# Altium PCB Test_Jig_Project.PcbDoc
Units mil, origin at the board's own origin, x right, y up, seen from the top; angles counter-clockwise.
Board outline 4425 x 3925 mil, 2 copper layers (Top Layer, Bottom Layer); 33 components, 51 nets, 183 pads, 42 vias.
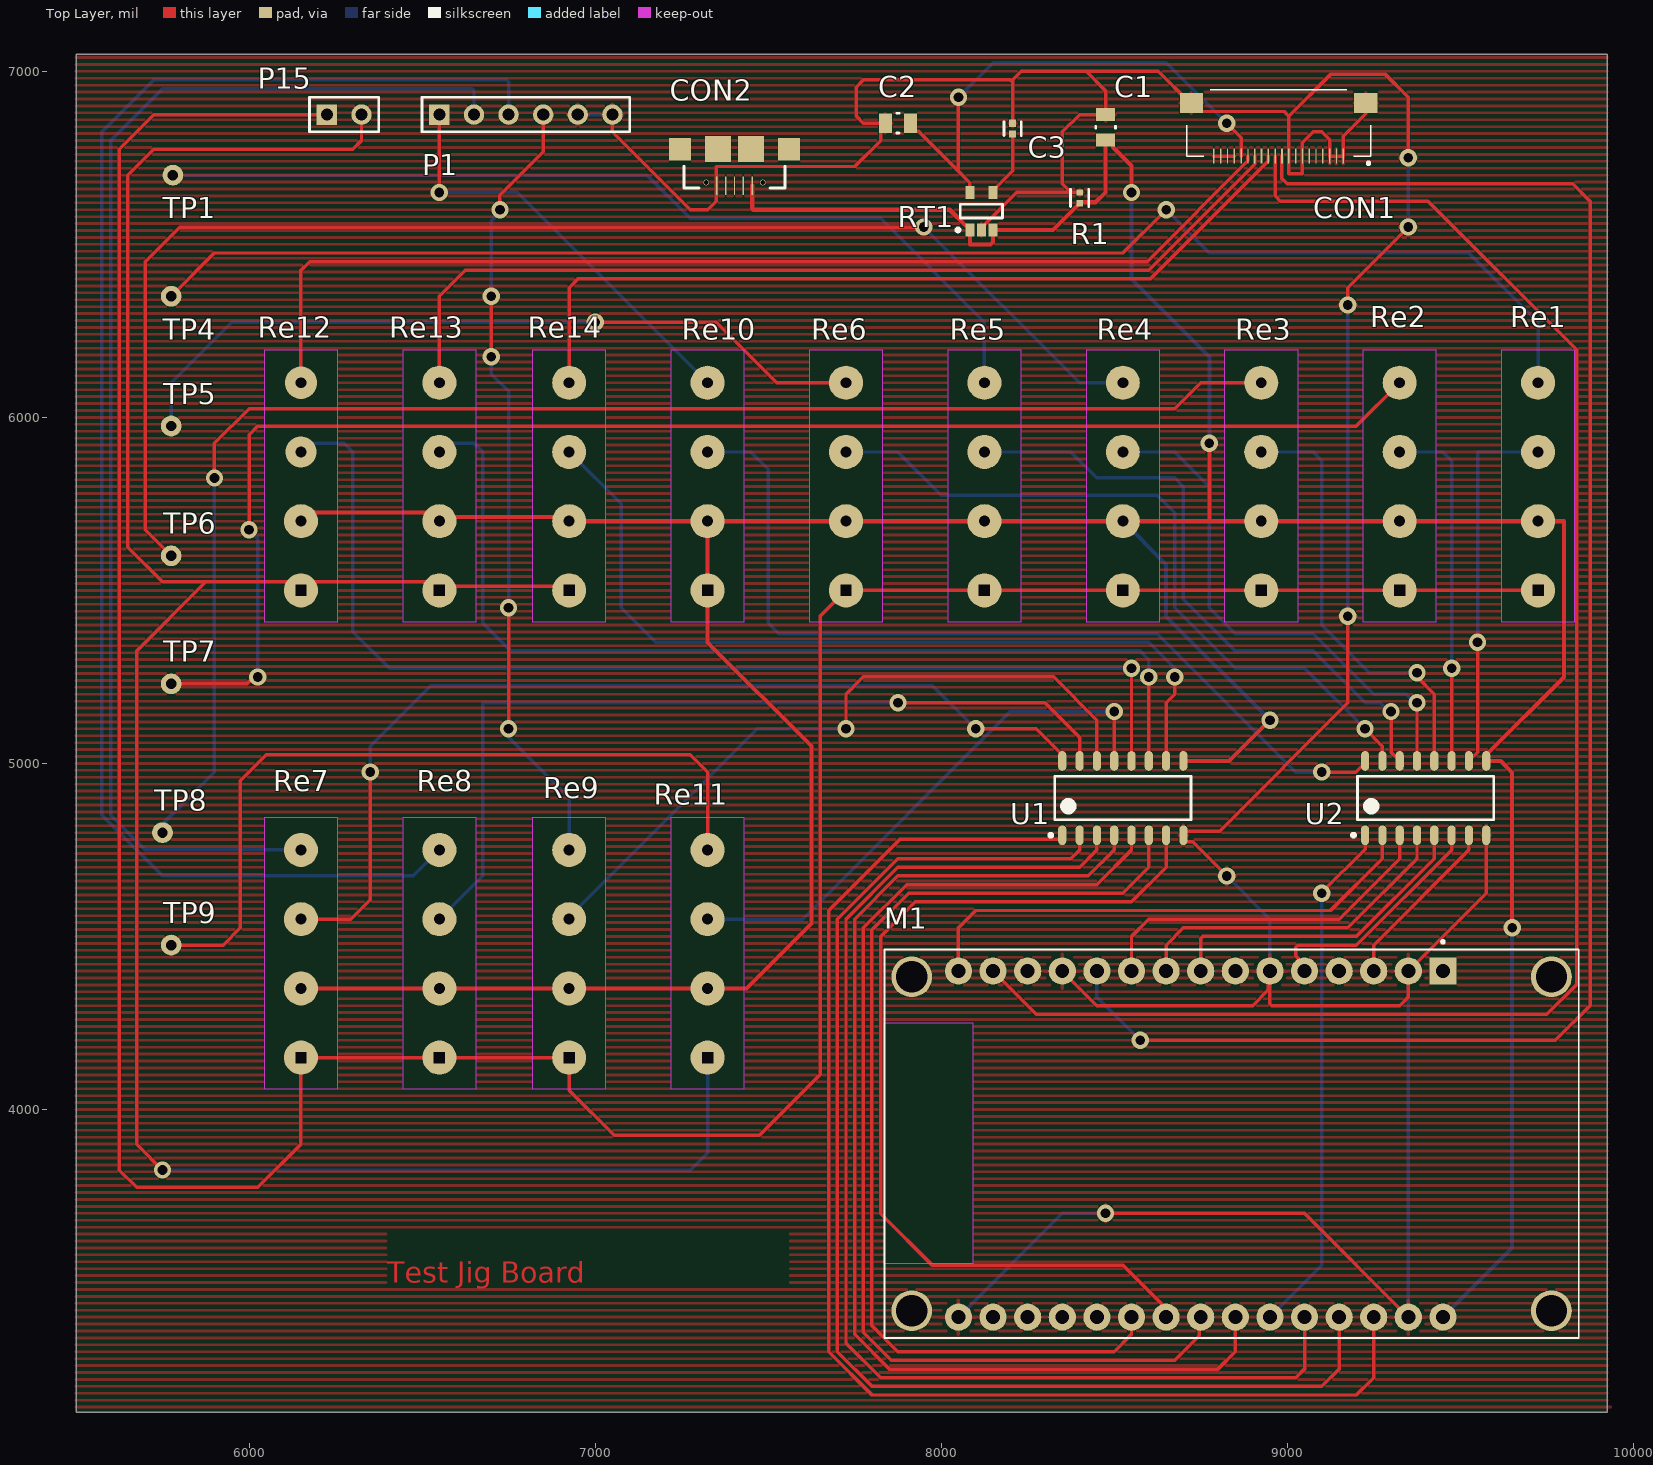
[diagram p0: Top Layer view]
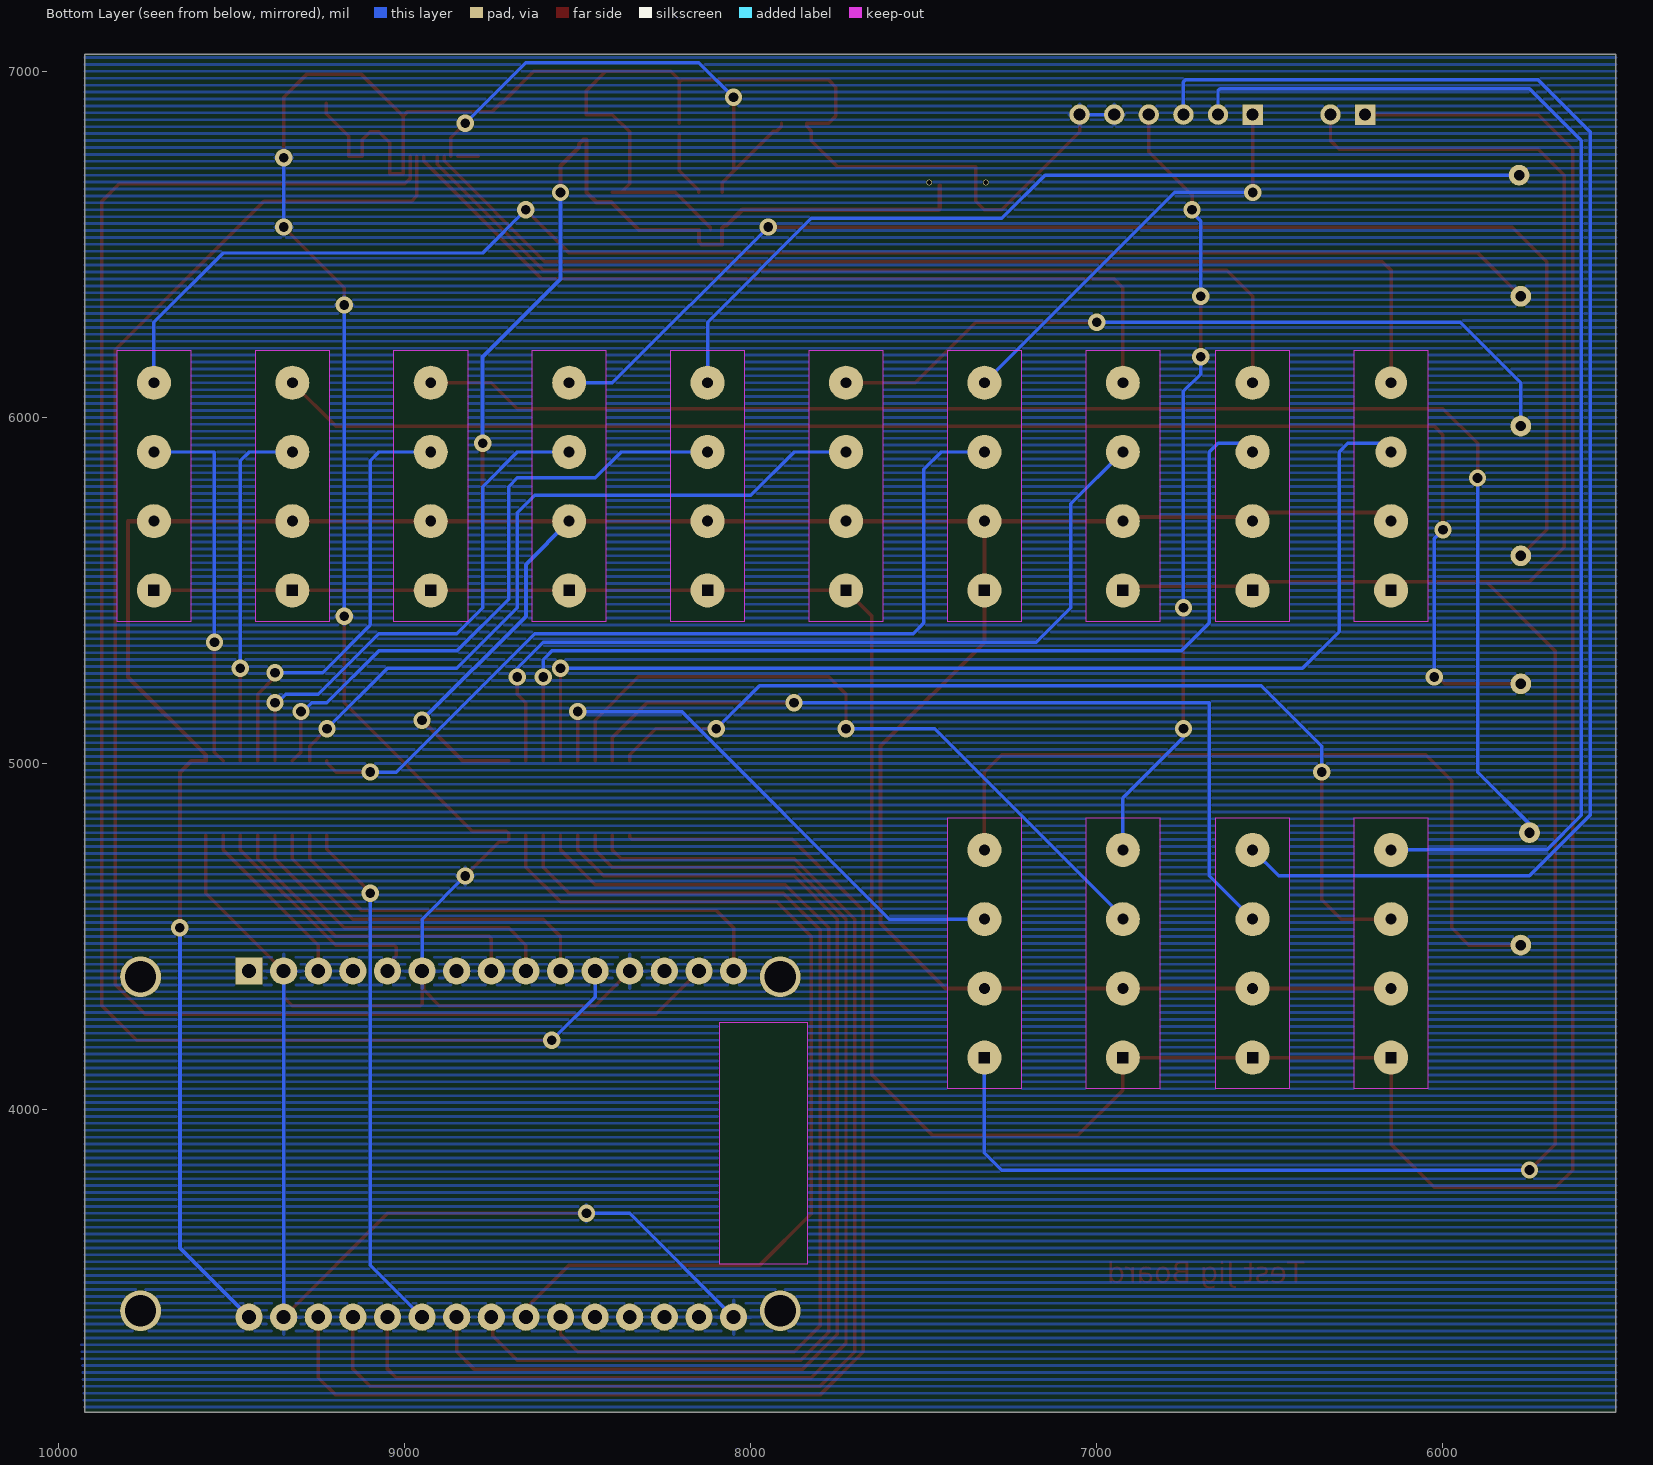
[diagram p1: Bottom Layer view, seen from below]
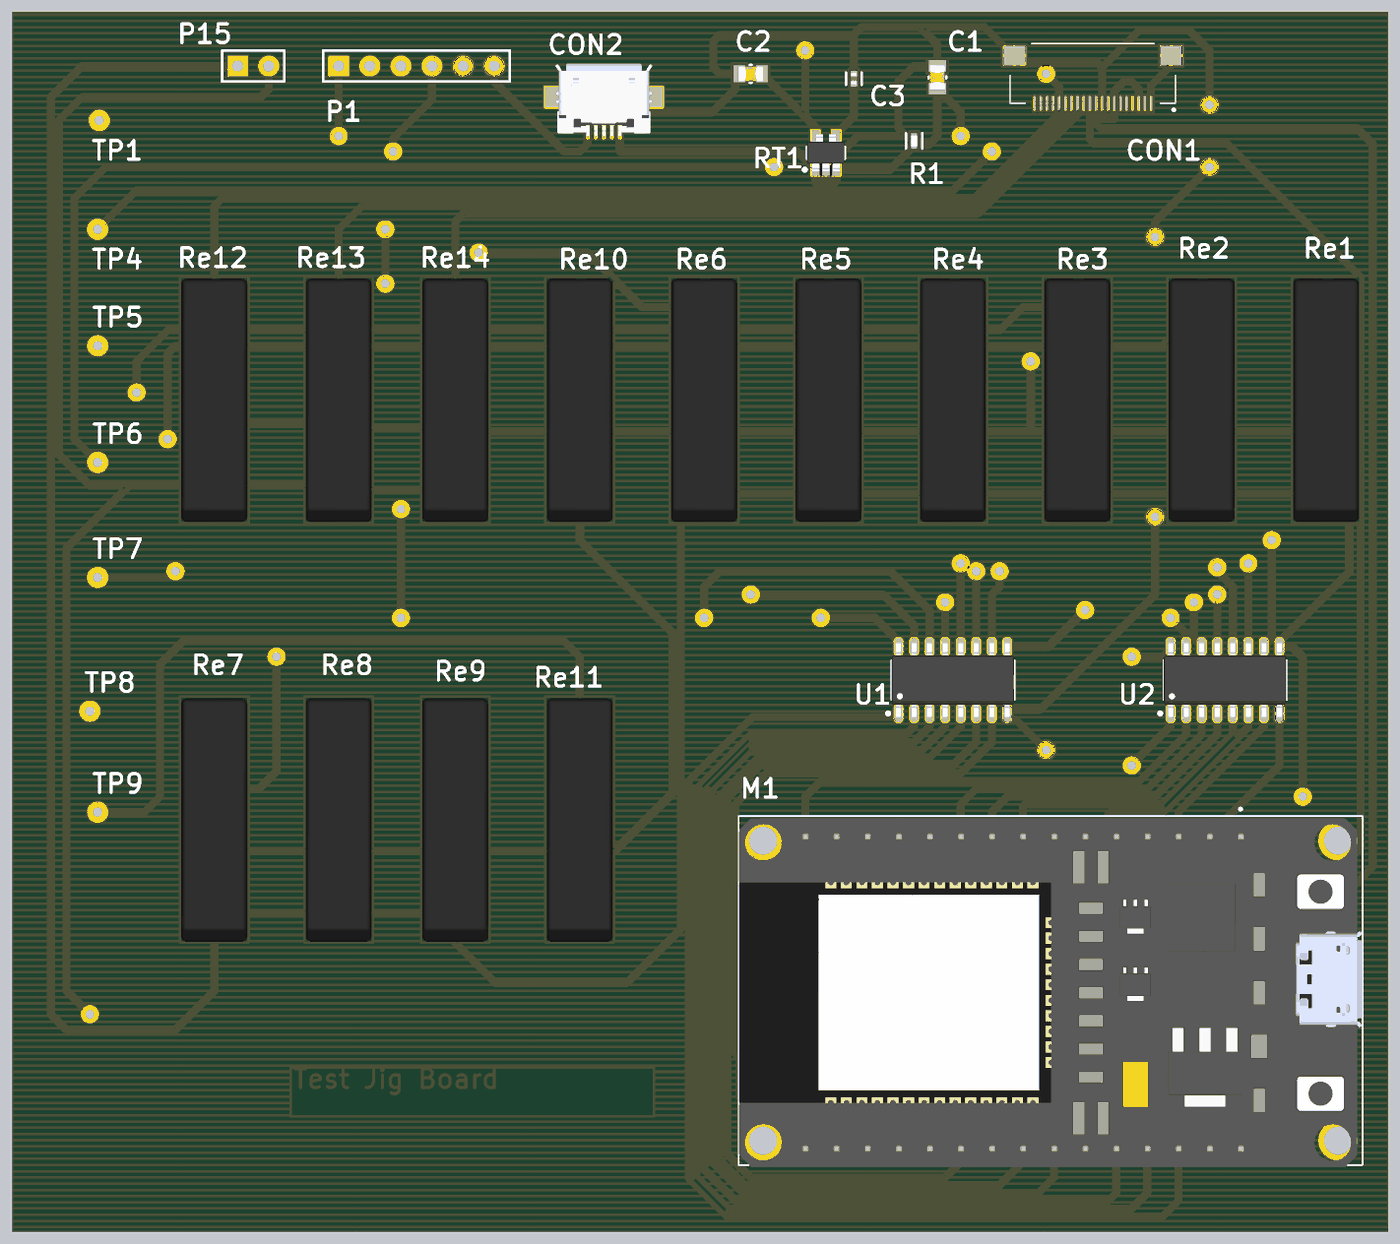
[diagram p2: 3D render of the assembled board from above, using the file's embedded part models]

## Layer stack, top to bottom
Top Solder: solder mask 0.4, Solder Resist, Dk 3.5
Top Layer: signal copper 1.4
Dielectric 1: dielectric 12.6, FR-4, Dk 4.8
Bottom Layer: signal copper 1.4
Bottom Solder: solder mask 0.4, Solder Resist, Dk 3.5

## Board outline
5500,3125 5500,7050 9925,7050 9925,3125

## Design rules (kind name [scope] priority, off if disabled: settings)
Clearance [InNet('USB_5V_IN') vs InNet('USB_5V_IN')] p1: gap=9 ignorepadtopadclearanceinfootprint=TRUE except(0: Arc-Hole Track-Hole SMDPad-Hole THPad-Hole Via-Hole Fill-Hole Poly-Hole Region-Hole Text-Hole)
HoleToHoleClearance [All] p1: gap=10 allowstackedmicrovias=FALSE
MinimumSolderMaskSliver [All] p1: minsoldermaskwidth=8
PlaneConnect [InNet('No Net')] p1: planeconnectstyle=Relief reliefexpansion=20 reliefentries=4 reliefconductorwidth=10 reliefairgap=10
PolygonConnect [All vs HasFootprint('ESP32-DEVKIT-V1')] p1: connectstyle=Relief reliefconductorwidth=10 reliefentries=4 polygonreliefangle="90 Angle" airgapwidth=10
RoutingVias [All] p1: holewidth=28 width=50 viastyle="Through Hole" minholewidth=28 minwidth=50 maxholewidth=28 maxwidth=50
SolderMaskExpansion [All] p1: expansion=4
Width "Schematic Width Constraint_1" [InNet('USB_5V_IN')] p1: maxlimit=12 minlimit=10 preferedwidth=12 minimp=50.000000 maximp=50.000000 favimp=50.000000
Width [InNet('USB_5V_IN')] p2: maxlimit=10 minlimit=10 preferedwidth=10
27 further rules are at their usual default settings.

## Components (designator, comment, footprint, x,y, rotation, side; value= is the part's Value field where it differs from the comment)
C1 "1uF" FP-CC0805-0_85-MFG 8475,6838.58 r90 top value="1 uF"
C2 "1uF" FP-CC0805-0_85-MFG 7875,6850 r180 top value="1 uF"
C3 "22pF" FP-C0402-BB-MFG 8206.5,6834.25 r90 top value="22 pF"
CON1 "XF2M-2015-1A" XF2M20151A 8975,6825 r180 top
CON2 "629105136821" 629105136821 7402.76,6775 r180 top
M1 "ESP32-WROOM-32" ESP32-DEVKIT-V1 8846.02,3923.7 r270 top
P1 "Header 6" HDR1X6 6550,6875 r0 top
P15 "Header 2" HDR1X2 6225,6875 r0 top
R1 "100kΩ" FP-CRCW0402-e3-IPC_C 8400,6634.17 r90 top
Re1 "PAN CHANG SIP-1A05" "PAN CHANG SIP-1A05"#1 9725,5500 r90 top
Re2 "PAN CHANG SIP-1A05" "PAN CHANG SIP-1A05"#1 9325,5500 r90 top
Re3 "PAN CHANG SIP-1A05" "PAN CHANG SIP-1A05"#1 8925,5500 r90 top
Re4 "PAN CHANG SIP-1A05" "PAN CHANG SIP-1A05"#1 8525,5500 r90 top
Re5 "PAN CHANG SIP-1A05" "PAN CHANG SIP-1A05"#1 8125,5500 r90 top
Re6 "PAN CHANG SIP-1A05" "PAN CHANG SIP-1A05"#1 7725,5500 r90 top
Re7 "PAN CHANG SIP-1A05" "PAN CHANG SIP-1A05"#1 6150,4150 r90 top
Re8 "PAN CHANG SIP-1A05" "PAN CHANG SIP-1A05"#1 6550,4150 r90 top
Re9 "PAN CHANG SIP-1A05" "PAN CHANG SIP-1A05"#1 6925,4150 r90 top
Re10 "PAN CHANG SIP-1A05" "PAN CHANG SIP-1A05"#2 7325,5500 r90 top
Re11 "PAN CHANG SIP-1A05" "PAN CHANG SIP-1A05"#1 7325,4150 r90 top
Re12 "PAN CHANG SIP-1A05" "PAN CHANG SIP-1A05"#3 6150,5500 r90 top
Re13 "PAN CHANG SIP-1A05" "PAN CHANG SIP-1A05"#1 6550,5500 r90 top
Re14 "PAN CHANG SIP-1A05" "PAN CHANG SIP-1A05"#1 6925,5500 r90 top
RT1 "RT9193" SOT85P279X130-5N 8211.54,6460.87 r90 top
TP1 "TP" Testpoint 5775,6700 r0 top net-tie
TP4 "TP" Testpoint 5775,6345 r90 top net-tie
TP5 "TP" Testpoint 5775,5970 r90 top net-tie
TP6 "TP" Testpoint 5775,5595 r90 top net-tie
TP7 "TP" Testpoint 5775,5225 r90 top net-tie
TP8 "TP" Testpoint 5750,4795 r90 top net-tie
TP9 "TP" Testpoint 5775,4470 r90 top net-tie
U1 "ULN2003" SOP127P600X175-16N 8525,4900 r90 top
U2 "ULN2003" SOP127P600X175-16N 9400,4900 r90 top

## Footprints (in the part's own frame and the unit in brackets; to place one, negate y for a bottom-side part, rotate by r counter-clockwise, add the part's x,y. Pads: shape width x height; smd on the part's side, far side on the other; paste and mask are expansions set on the pad)
629105136821 [mm] "Micro USB 2.0 SMT Type B Horizontal 5 Contacts"
  rect 0.095x1.35 smd: 1(-1.3,2.675) 2(-0.65,2.675) 3(0,2.675) 4(0.65,2.675) 5(1.3,2.675)
  round 0.421 hole 0.344 unplated: MH1(-2.075,2.45) MH2(2.075,2.45)
  rect 1.597x1.671 smd: Shell(-4,0) Shell(4,0)
  rect 1.9x1.9 smd: Shell(-1.2,0) Shell(1.2,0)
  silkscreen extent -3.7,1.25 3.7,2.85, body extent -4,-2.73 4,3.17, height 2.69
ESP32-DEVKIT-V1 [mm]
  rect 2x2 hole 1.02: 1(-12.098,15.341)
  round 2 hole 1.02: 2(-12.098,12.801) 3(-12.098,10.261) 4(-12.098,7.721) 5(-12.098,5.181) 6(-12.098,2.641) 7(-12.098,0.101) 8(-12.098,-2.439) 9(-12.098,-4.979) 10(-12.098,-7.519) 11(-12.098,-10.059) 12(-12.098,-12.599) 13(-12.098,-15.139) 14(-12.098,-17.679) 15(-12.098,-20.219) 16(13.302,-20.219) 17(13.302,-17.679) 18(13.302,-15.139) 19(13.302,-12.599) 20(13.302,-10.059) 21(13.302,-7.519) 22(13.302,-4.979) 23(13.302,-2.439) 24(13.302,0.101) 25(13.302,2.641) 26(13.302,5.181) 27(13.302,7.721) 28(13.302,10.261) 29(13.302,12.801) 30(13.302,15.341)
  round 3 hole 2.289 unplated: ""(-11.678,23.301) ""(-11.678,-23.649) ""(12.832,23.301) ""(12.832,-23.649)
  Keep-Out Layer region: 9.382,-25.649 -8.308,-25.649 -8.308,-19.159 9.382,-19.159
  Keep-Out Layer region: 9.382,-25.649 -8.308,-25.649 -8.308,-19.159 9.382,-19.159
  Keep-Out Layer region: 9.382,-25.649 -8.308,-25.649 -8.308,-19.159 9.382,-19.159
  silkscreen extent -14.35,-25.65 14.83,25.3, body extent -13.5,-25.63 15,25.3, height 7.2
FP-C0402-BB-MFG [mm]
  rect 0.52x0.52 smd paste+0 mask+0: 1(-0.4,0) 2(0.4,0)
  silkscreen extent -0.5,-0.64 0.5,0.63, body extent -0.8,-0.4 0.8,0.4, height 0.25
FP-CC0805-0_85-MFG [mm]
  rect 0.95x1.4 smd paste+0 mask+0: 1(-0.925,0) 2(0.925,0)
  silkscreen extent -0.07,-0.73 0.07,0.73, body extent -1.6,-1.05 1.6,1.05, height 0.25
FP-CRCW0402-e3-IPC_C [mil]
  rect 18.43x18.6 smd paste+0 mask+0: 1(-15.83,0) 2(15.83,0)
  silkscreen extent -25,-27 25,27, body extent -29,-15 29,15, height 10
HDR1X2 [mm] "Connector; Header; 2 Position"
  rect 1.5x1.5 hole 0.9: 1(0,0)
  round 1.5 hole 0.9: 2(2.54,0)
  silkscreen extent -1.27,-1.27 3.81,1.27
HDR1X6 [mm] "Connector; Header; 6 Position"
  rect 1.5x1.5 hole 0.9: 1(0,0)
  round 1.5 hole 0.9: 2(2.54,0) 3(5.08,0) 4(7.62,0) 5(10.16,0) 6(12.7,0)
  silkscreen extent -1.27,-1.27 13.97,1.27
"PAN CHANG SIP-1A05"#1 [mm]
  round 2.5 hole 0.8 square: 1(0,0)
  round 2.5 hole 0.8: 2(5.08,0) 3(10.16,0) 4(15.24,0)
  Top Layer pour cut-out: 6.477,8.763
  Keep-Out Layer region: -2.286,-2.698 17.614,-2.698 17.614,2.702 -2.286,2.702
  body extent -2.33,-2.7 17.57,2.7, height 7.95
"PAN CHANG SIP-1A05"#2 [mm]
  round 2.5 hole 0.8 square paste+0.254: 1(0,0)
  round 2.5 hole 0.8: 2(5.08,0) 3(10.16,0)
  round 2.5 hole 0.8 mask+0.076: 4(15.24,0)
  Top Layer pour cut-out: 6.477,8.763
  Keep-Out Layer region: -2.286,-2.698 17.614,-2.698 17.614,2.702 -2.286,2.702
  body extent -2.33,-2.7 17.57,2.7, height 7.95
"PAN CHANG SIP-1A05"#3 [mm]
  round 2.5 hole 0.8 square: 1(0,0)
  round 2.5 hole 0.8: 2(5.08,0)
  round 2.297 hole 0.8: 3(10.16,0)
  round 2.373 hole 0.8: 4(15.24,0)
  Top Layer pour cut-out: 6.477,8.763
  Keep-Out Layer region: -2.286,-2.698 17.614,-2.698 17.614,2.702 -2.286,2.702
  body extent -2.33,-2.7 17.57,2.7, height 7.95
SOP127P600X175-16N [mm] "SOP, 16-Leads, Body 9.90x3.90mm, Pitch 1.27mm, IPC Medium Density"
  oval 1.45x0.6 smd: 1(-2.725,4.445) 2(-2.725,3.175) 3(-2.725,1.905) 4(-2.725,0.635) 5(-2.725,-0.635) 6(-2.725,-1.905) 7(-2.725,-3.175) 8(-2.725,-4.445) 9(2.725,-4.445) 10(2.725,-3.175) 11(2.725,-1.905) 12(2.725,-0.635) 13(2.725,0.635) 14(2.725,1.905) 15(2.725,3.175) 16(2.725,4.445)
  silkscreen extent -2.85,-5 1.6,5.42, body extent -3,-5 3,5, height 1.75
SOT85P279X130-5N [mm] "SOT23, 5-Leads, Body 2.90x2.79mm, Pitch 0.85mm, IPC Medium Density"
  rect 0.95x0.65 smd: 1(2.054,3.263) 2(2.054,2.413) 3(2.054,1.563) 4(4.804,1.563) 5(4.804,3.263)
  silkscreen extent 1.93,0.86 3.93,4.26, body extent 1.93,0.86 4.93,3.96, height 1.3
Testpoint [mil]
  round 60 hole 30: 1(5,0)
XF2M20151A [mm]
  rect 0.098x1.1 smd mask+0.051: 1(-4.75,1.78) 2(-4.25,1.78) 3(-3.75,1.78) 4(-3.25,1.78) 5(-2.75,1.78) 6(-2.25,1.78) 7(-1.75,1.78) 8(-1.25,1.78) 9(-0.75,1.78) 15(2.25,1.78) 16(2.75,1.78) 17(3.25,1.78) 18(3.75,1.78) 19(4.25,1.78) 20(4.75,1.78)
  rect 0.123x1.1 smd mask+0.051: 10(-0.25,1.78) 11(0.25,1.78) 12(0.75,1.78) 13(1.25,1.78) 14(1.75,1.78)
  rect 1.7x1.5 smd: MP1(-6.4,-2.12) MP2(6.4,-2.12)
  silkscreen extent -6.75,-3.1 6.75,2.4

## Part data
C1 C2: library part CMP-03422-000182-1, "CAP CER 1UF 10V X7R 0805", Capacitance="1 uF", Manufacturer=Yageo, Manufacturer Part Number=CC0805KKX7R6BB105, Package=CC0805-0.85, Temperature="-30°C to +85°C", Temperature Characteristic=X7R, Temperature Range High=+85°C, Temperature Range Low=-30°C, Tolerance=0.1, Voltage Rating="10 V", Automotive=No, Category=Cap, ComponentLink2Description=Datasheet, ComponentLink2URL=http://www.yageo.com/documents/recent/UPY-GPHC_Y5V_6.3V-to-50V_8.pdf, Device Class L1="Passive Components", Device Class L2=Capacitors, Device Class L3="Ceramic Capacitors", Digikey Description="CAP CER 1UF 10V X7R 0805", Footprint Url=http://www.yageo.com/exep/pages/download/literatures/UPY-C_GEN_24.pdf, Height=0.95mm, Ipc Land Pattern Name=CAPC200125X85, Lead Free=Yes, Material=Ceramic, Mouser Description="Multilayer Ceramic Capacitors MLCC - SMD/SMT 1.0uF 10V X7R 10%", Octopart=https://octopart.com/cc0805kkx7r6bb105-yageo-42522859, RoHS=TRUE
C3: library part CMP-1034-00897-3, "CAP CER 22PF 10V NP0 0402", Capacitance="22 pF", Manufacturer=Kemet, Manufacturer Part Number=C0402C220K8GACTU, Package=C0402-BB, Temperature="-55°C to +125°C", Temperature Characteristic=C0G, Temperature Coefficient=15%, Temperature Range High=+125°C, Temperature Range Low=-55°C, Tolerance=0.1, Voltage Rating="10 V", Automotive=No, Category=Cap, ComponentLink2Description=Datasheet, ComponentLink2URL=https://content.kemet.com/datasheets/KEM_C1002_X7R_SMD.pdf, Device Class L1="Passive Components", Device Class L2=Capacitors, Device Class L3="Ceramic Capacitors", Digikey Description="CAP CER 22PF 10V NP0 0402", Height=0.55mm, Ipc Land Pattern Name=CAPC10050X50, Lead Free=Yes, Material=Ceramic, Mouser Description="Multilayer Ceramic Capacitors MLCC - SMD/SMT 10volts 22pF C0G 10%", Octopart=https://octopart.com/c0402c220k8gactu-kemet-12592189, RoHS=TRUE
CON1: "OMRON - XF2M-2015-1A - FFC / FPC Board Connector, 0.5 mm, 20 Contacts, Receptacle, XF Series, Surface Mount, Top, Bottom", Manufacturer_Name="Omron Electronics", Mouser Part Number=653-XF2M-2015-1A, Datasheet Link=https://datasheet.lcsc.com/lcsc/1912111437_Omron-Electronics-XF2M-2015-1A_C57541.pdf, Geometry.Height=3.2mm, Manufacturer_Part_Number=XF2M-2015-1A, Mouser Price/Stock=https://www.mouser.co.uk/ProductDetail/Omron-Electronics/XF2M-2015-1A?qs=9iNEzSI19qWZ677VhkompQ%3D%3D, Unit Price="US$ 0.4815"
CON2: library part CMP-1502-03253-1, "Micro USB 2.0 Type B Receptacle WR-COM, Horizontal, SMT, with Pads and Pegs", Contact Resistance=30mOhm, Manufacturer="Wurth Elektronik", Operating temperature=-40to105degC, Rated Current=1A, Working Voltage=30VAC, Connector Type=MicroUSB2.0TypeB, Datasheet URL=https://katalog.we-online.de/em/datasheet/629105136821.pdf, Gender=Receptacle, Manufacturer URL=http://www.we-online.de, Mounting Technology=SMT, Orientation=Horizontal, Package Reference=629105136821, Packaging=TapeandReel, Part Number=629105136821, Publisher=WurthElektronik
M1: library part ESP32-DEVKIT-V1, "Dual core, Wi-Fi: 2.4 GHz up to 150 Mbits/s,BLE (Bluetooth Low Energy) and legacy Bluetooth, 32 bits, Up to 240 MHz"
P1: "Header, 6-Pin", LatestRevisionDate=17-Jul-2002, LatestRevisionNote="Re-released for DXP Platform.", Publisher="Altium Limited"
P15: "Header, 2-Pin", LatestRevisionDate=17-Jul-2002, LatestRevisionNote="Re-released for DXP Platform.", Publisher="Altium Limited"
R1: library part CMP-2002-08123-3, "RES Thick Film, 100kO, 1%, 0.063W, 100ppm/°C, 0402", Case/Package=0402, Case Code (Metric)=1005, Max Operating Temperature=155°C, Max Power Dissipation=63mW, Min Operating Temperature=-55°C, Package Quantity=10000, Resistance=100kR, Temperature Coefficient=100ppm/°C, Tolerance=1%, Voltage Rating=50V, Case Code (Imperial)=0402, Composition="Thick Film", Contact Plating=Tin, Depth=0.5mm, Features="Automotive AEC-Q200", Height=0.35mm, Lead Free="Lead Free", Length=1mm, Military Standard=Not, Mount="Surface Mount", Number of Pins=2, Number of Terminations=2, Packaging="Tape and Reel", Power Rating=63mW, Radiation Hardening=No, Termination=SMD/SMT, Voltage Rating (DC)=50V, Weight=2.3E-05oz, Width=0.02inch
Re1 Re2 Re3 Re4 Re5 Re6 Re7 Re8 Re9 Re10 Re11 Re12 Re13 Re14: "SPST - NO 5V DC Nolocking Through Hole Reed Relays ROHS", LCSC Part #=C10496, Mfr. Part #=SIP-1A05
RT1: library part Component_1
U1 U2: library part Component_1, Manufacturer="Changjiang Electronics Tech", Package=SOP-16, Datasheet=https://datasheet.lcsc.com/lcsc/2108201930_Changjiang-Electronics-Tech--CJ-ULN2003_C2829422.pdf, Mfr. Part #=ULN2003, Unit Price="$ 0.2329"

## Via types
v1: diameter 50, hole 28, Top Layer to Bottom Layer, 42 vias

## Nets (pads, with @x,y where several pads share a name; then routed paths per layer and width w, separated by ;. In a path a pad name is that pad's centre, name@x,y a point inside that pad or via, vN(x,y) a via of type N, cw(c..) or ccw(c..) an arc to the next point about the centre after c; other vN are vias at no path point)
D+: M1.27 U1.2 | length 3737.7
  Top Layer w10: U1.2 8400,4750 8375,4725 7875,4725 7700,4550 7700,3300 7800,3200 9100,3200 9150,3250 M1.27
D+_out: Re8.3 U1.15 | length 2510.9
  Top Layer w10: v1(7875,5175) 8300,5175 8400,5075 U1.15
  Bottom Layer w10: Re8.3 6675,4675 6675,5175 v1(7875,5175)
D-: M1.28 U1.1 | length 3865.9
  Top Layer w10: U1.1 8350,4787.28 8343.71,4780.98 7880.98,4780.98 7675,4575 7675,3300 7800,3175 9200,3175 9250,3225 M1.28
D-_out: Re7.3 U1.16 | length 2840.3
  Top Layer w10: Re7.3 6294.14,4550 6350,4605.86 v1(6350,4975) ; v1(8100,5100) 8275,5100 8350,5025 U1.16
  Bottom Layer w10: v1(6350,4975) 6350,5050 6525,5225 7975,5225 v1(8100,5100)
ESP_RXD: CON1.12 Re14.4 | length 2461.1
  Top Layer w10: Re14.4 6925,6375 6950,6400 8604.62,6400 8945.47,6740.85 CON1.12
GND: C1.2 C2.2 C3.2 CON1.1 CON1.2 CON1.3 CON1.7 CON1.9 CON1.MP1 CON1.MP2 CON2.5 M1.2 M1.6 M1.12 M1.16 M1.29 P1.5 P1.6 R1.2 RT1.2 U1.8 U2.8 | length 12035.9
  Top Layer w10: P1.6 7050,6825 7275,6600 7325,6600 7350,6625 7350,6725 7750,6725 7824.88,6799.88 7824.88,6827.44 7838.58,6841.14 C2.2 7775,6850 7754.14,6870.86 7754.14,6954.14 7775,6975 8200,6975 8206.5,6968.5 ; RT1.2 8116.54,6547.64 8218.9,6650 8375,6650 ; C3.2 8206.5,6968.5 ; M1.12 8450,4300 8900,4300 8945.63,4345.63 8945.63,4395.63 M1.6 8950,4305.86 8955.86,4300 9325,4300 9350,4325 M1.2 9575,4625 U2.8 ; R1.2@8400.08,6650 R1.2 8375,6650 ; v1(8475,3700) 9050,3700 M1.29 ; v1(8825,4675) 8726.62,4773.38 8706.29,4773.38 8700,4779.67 U1.8 8700,4798.16 8706.29,4804.45 8804.45,4804.45 9175,5175 v1(9175,5425) ; v1(9175,6325) 9175,6375 v1(9350,6550) ; CON1.MP1 9226.97,6876.97 9162.01,6812.01 CON1.1 CON1.2 CON1.3 9122.64,6802.36 9100,6825 9075,6825 9043.9,6793.9 CON1.7 9043.9,6704.14 9004.53,6704.14 CON1.9 9004.53,6870.47 ; v1(9350,6750) 9350,6925 9284.06,6990.94 9125,6990.94 9004.53,6870.47 ; 8206.5,6968.5 8206.5,6975.64 8230.86,7000 8419.14,7000 ; 8375,6650 8350,6675 8350,6825 8400,6875 C1.2 8475,6944.14 8419.14,7000 ; 8419.14,7000 8627.56,7000 8719.09,6908.46 CON1.MP2 8747.56,6883.94 8991.06,6883.94 9004.53,6870.47
  Bottom Layer w10: P1.5 P1.6 ; M1.16 8350,3700 v1(8475,3700) ; v1(8825,4675) 8950,4550 M1.6 ; v1(9175,5425) v1(9175,6325) ; M1.29 M1.2 ; v1(9350,6550) v1(9350,6750)
NetC3_1: C3.1 RT1.4 | length 191.9
  Top Layer w10: RT1.4 8150,6655.91 8206.5,6712.4 C3.1
NetRe1_4: Re1.4 TP4.1 | length 4363.2
  Top Layer w10: TP4.1 5900,6475 8525,6475 v1(8650,6600)
  Bottom Layer w10: v1(8650,6600) 8775,6475 9525,6475 9725,6275 Re1.4
NetRe2_4: Re2.4 TP7.1 | length 4355.8
  Top Layer w10: TP7.1 5994.18,5230 6014.18,5250 v1(6025,5250) ; v1(6000,5675) 6000,5950 6025,5975 9200,5975 Re2.4
  Bottom Layer w10: v1(6000,5675) 6025,5650 v1(6025,5250)
NetRe3_4: Re3.4 TP8.1 | length 4284.6
  Top Layer w10: v1(5900,5825) 5900,5925 6000,6025 8675,6025 8750,6100 Re3.4
  Bottom Layer w10: TP8.1 5750,4825 5900,4975 v1(5900,5825)
NetRe4_4: Re4.4 TP6.1 | length 3933.9
  Top Layer w10: TP6.1 5700,5675 5700,6450 5800,6550 v1(7950,6550)
  Bottom Layer w10: v1(7950,6550) 8400,6100 Re4.4
NetRe5_4: Re5.4 TP1.1 | length 2696
  Bottom Layer w10: TP1.1 7150,6700 7275,6575 7825,6575 8125,6275 Re5.4
NetRe6_4: Re6.4 TP5.1 | length 2220
  Top Layer w10: v1(7000,6275) 7350,6275 7525,6100 Re6.4
  Bottom Layer w10: TP5.1 5775,6100 5950,6275 v1(7000,6275)
NetRe11_4: Re11.4 TP9.1 | length 2272.5
  Top Layer w10: TP9.1 5925,4475 5975,4525 5975,4950 6050,5025 7275,5025 7325,4975 Re11.4
Ribbon_D+: M1.22 U1.7 | length 2764.9
  Top Layer w10: M1.22 8650,3425 8525.67,3549.33 7975,3549.33 7825,3699.33 7825,4500 7925,4600 8550,4600 8650,4700 U1.7
Ribbon_D+_out: Re13.3 U1.11 | length 2891.1
  Top Layer w10: U1.11 v1(8600,5250)
  Bottom Layer w10: Re13.3@6550,5925 6650,5925 6675,5900 6675,5405.86 6755.86,5325 8575,5325 8600,5300 v1(8600,5250)
Ribbon_D-: M1.23 U1.5 | length 3169.6
  Top Layer w10: U1.5 8550,4750 8450,4650 7900,4650 7775,4525 7775,3355.86 7855.86,3275 8675,3275 8745.63,3345.63 8745.63,3395.63 M1.23
Ribbon_D-_out: Re12.3 U1.12 | length 3241.1
  Top Layer w10: U1.12 v1(8550,5275)
  Bottom Layer w10: Re12.3@6150,5925 6275,5925 6300,5900 6300,5380.86 6405.86,5275 v1(8550,5275)
Ribbon_RXD: M1.21 U1.6 | length 2963.5
  Top Layer w10: M1.21 8550,3350 8500,3300 7875,3300 7800,3375 7800,4519.14 7905.86,4625 8525,4625 8600,4700 U1.6
Ribbon_RXD_out: Re14.3 U1.10 | length 2462.7
  Top Layer w10: U1.10 8650,5175 8675,5200 v1(8675,5250)
  Bottom Layer w10: Re14.3 7075,5750 7075,5450 7175,5350 8600,5350 8675,5275 v1(8675,5250)
RXD: M1.26 U1.3 | length 3602.3
  Top Layer w10: U1.3 8450,4750 8400,4700 7875,4700 7725,4550 7725,3325 7825,3225 9025,3225 9050,3250 M1.26
RXD_out: Re9.3 U1.14 | length 2047.1
  Top Layer w10: v1(7725,5100) 7725,5200 7775,5250 8325,5250 8450,5125 U1.14
  Bottom Layer w10: Re9.3 6925,4556.91 7468.09,5100 v1(7725,5100)
SCL: CON1.11 M1.14 | length 4778
  Top Layer w10: M1.14 8275,4275 9750,4275 9836.23,4361.23 9836.23,6195.53 9406.76,6625 8980.32,6625 8965.16,6640.16 CON1.11
SDA: CON1.10 M1.11 | length 4900.1
  Top Layer w10: v1(8575,4200) 9775,4200 9875,4300 9875,6625 9825,6675 9000,6675 8984.84,6690.16 CON1.10
  Bottom Layer w10: M1.11 8450,4325 v1(8575,4200)
TP1: M1.10 U2.3 | length 1035.9
  Top Layer w10: M1.10 8550,4500 8600,4550 9150,4550 9325,4725 U2.3
TP1_out: Re5.3 U2.14 | length 1829.1
  Top Layer w10: v1(9300,5150) 9300,5032.28 U2.14
  Bottom Layer w10: Re5.3 8375,5900 8450,5825 8675,5825 8700,5800 8700,5475 8850,5325 9075,5325 9225,5175 9268.43,5175 9293.43,5150 v1(9300,5150)
TP4: M1.3 U2.7 | length 506.6
  Top Layer w10: M1.3 9250,4475 9525,4750 U2.7
TP4_out: Re1.3 U2.10 | length 1078.1
  Top Layer w10: U2.10 9550,5032.28 v1(9550,5350)
  Bottom Layer w10: v1(9550,5350) 9550,5900 Re1.3
TP5: M1.15 U2.2 | length 1500.6
  Top Layer w10: M1.15 8050,4525 8100,4575 9125,4575 9275,4725 U2.2
TP5_out: Re6.3 U2.15 | length 2105.9
  Top Layer w10: v1(9225,5100) 9275,5050 U2.15
  Bottom Layer w10: Re6.3 7875,5900 8000,5775 8625,5775 8675,5725 8675,5450 8850,5275 9050,5275 v1(9225,5100)
TP6: M1.9 U2.4 | length 971.3
  Top Layer w10: M1.9 8650,4475 8700,4525 9175,4525 9375,4725 U2.4
TP6_out: Re4.3 U2.13 | length 1523
  Top Layer w10: U2.13 v1(9375,5175)
  Bottom Layer w10: Re4.3 8675,5900 8775,5800 8775,5450 8850,5375 9075,5375 9250,5200 9343.43,5200 9368.43,5175 v1(9375,5175)
TP7: M1.5 U2.6 | length 688.5
  Top Layer w10: M1.5 9050,4418.6 9025,4443.6 9025,4469.14 9030.86,4475 9200,4475 9475,4750 U2.6
TP7_out: Re2.3 U2.11 | length 1028.1
  Top Layer w10: U2.11 v1(9475,5275)
  Bottom Layer w10: Re2.3 9450,5900 9475,5875 v1(9475,5275)
TP8: M1.8 U2.5 | length 932.5
  Top Layer w10: M1.8 8750,4494.14 8755.86,4500 9200,4500 9425,4725 U2.5
TP8_out: Re3.3 U2.12 | length 1268.2
  Top Layer w10: v1(9375,5262.5) 9375,5250 9425,5200 U2.12
  Bottom Layer w10: Re3.3 9075,5900 9100,5875 9100,5400 9237.5,5262.5 v1(9375,5262.5)
TP9: M1.24 U1.4 | length 3337.7
  Top Layer w10: U1.4 8500,4750 8425,4675 7875,4675 7750,4550 7750,3350 7850,3250 8800,3250 8850,3300 M1.24
TP9_out: Re11.3 U1.13 | length 1566.2
  Top Layer w10: U1.13 v1(8500,5150)
  Bottom Layer w10: Re11.3 7600,4550 8200,5150 v1(8500,5150)
USB1_5V_IN: P1.1 Re10.4 | length 1227.8
  Top Layer w10: v1(6550,6650) P1.1
  Bottom Layer w10: v1(6550,6650) 6775,6650 Re10.4
USB1_D+: P1.3 Re8.4 | length 4387.3
  Bottom Layer w10: Re8.4 6475,4675 5750,4675 5575,4850 5575,6825 5725,6975 6744.14,6975 6750,6969.14 P1.3
USB1_D-: P1.2 Re7.4 | length 3725.1
  Bottom Layer w10: Re7.4 5700,4750 5600,4850 5600,6800 5750,6950 6644.14,6950 6650,6944.14 P1.2
USB1_RXD: P1.4 Re9.4 | length 2280.3
  Top Layer w10: v1(6700,6175) v1(6700,6350) ; v1(6725,6600) 6725,6642.43 6850,6767.43 P1.4 ; v1(6750,5100) v1(6750,5450)
  Bottom Layer w10: v1(6700,6175) 6700,6125 6750,6075 v1(6750,5450) ; v1(6700,6350) 6700,6567.43 6725,6592.43 v1(6725,6600) ; v1(6750,5100) 6750,5075 6925,4900 Re9.4
USB_5V_IN: C1.1 CON2.1 M1.30 R1.1 Re1.2 Re2.2 Re3.2 Re4.2 Re5.2 Re6.2 Re7.2 Re8.2 Re9.2 Re10.1 Re10.2 Re11.2 Re12.2 Re13.2 Re14.2 RT1.1 RT1.3 U1.9 U2.9 | length 12705.6
  Top Layer w12: Re7.2 Re8.2 Re9.2 Re11.2 7437.22,4350 7625,4537.78 7625,5050 7325,5350 Re10.1 Re10.2 ; Re12.2@6150,5725 6550,5725 6562.5,5712.5 6912.5,5712.5 Re14.2 Re10.2 ; CON2.1 7453.94,6603.09 7457.03,6600 8024.8,6600 8070.37,6554.43 8076.27,6554.43 8083.07,6547.64 RT1.1 8083.07,6500 8142.97,6500 8150,6507.03 RT1.3 8323.31,6541.73 8399.92,6618.34 R1.1 8400.08,6618.34 8403.3,6621.55 8446.55,6621.55 8475,6650 C1.1 8483.86,6802.16 8496.56,6789.46 8496.56,6780.6 8550,6727.16 v1(8550,6650) ; U1.9 8832.28,5007.28 v1(8950,5125) ; v1(8775,5925) 8775,5700 ; v1(9650,4525) 9650,4974.2 9616.92,5007.28 U2.9 9575,5024.02 9800,5249.02 9800,5700 Re1.2 Re2.2 Re3.2 8775,5700 ; Re10.2 Re6.2 Re5.2 Re4.2 8775,5700
  Bottom Layer w12: Re4.2 8650,5575 8650,5425 v1(8950,5125) ; v1(8550,6650) 8550,6400 8775,6175 v1(8775,5925) ; M1.30 9650,3600 v1(9650,4525)
USB_5V_OUT: CON1.17 CON1.18 CON1.19 CON1.20 | length 59.1
  Top Layer w10: CON1.20 CON1.19 CON1.18 CON1.17
USB_D+: CON1.14 Re13.4 | length 2762.8
  Top Layer w10: Re13.4@6550,6125 6550,6350 6625,6425 8600,6425 8906.1,6731.1 CON1.14
USB_D-: CON1.15 Re12.4 | length 3181
  Top Layer w10: Re12.4@6150,6125 6150,6425 6175,6450 8595.07,6450 8886.42,6741.35 CON1.15
USB_ON: M1.25 U2.1 | length 1506.6
  Top Layer w10: v1(9100,4625) 9100,4627.21 9225,4752.21 U2.1
  Bottom Layer w10: M1.25 9100,3550 v1(9100,4625)
USB_ON_out: Re10.3 U2.16 | length 2559.9
  Top Layer w10: v1(9100,4975) 9198.16,4975 9225,5001.84 U2.16
  Bottom Layer w10: Re10.3 7450,5900 7500,5850 7500,5405.86 7530.86,5375 8625,5375 9025,4975 v1(9100,4975)
VCC_3.3V: C2.1 CON1.16 RT1.5 | length 1491.1
  Top Layer w10: C2.1 7911.42,6841.14 7925.12,6827.44 7933.98,6827.44 8050,6711.42 ; v1(8050,6925) 8050,6711.42 ; RT1.5 8083.07,6678.35 8050,6711.42 ; v1(8825,6850) 8866.73,6808.27 CON1.16
  Bottom Layer w10: v1(8050,6925) 8150,7025 8650,7025 v1(8825,6850)
Voltmeter+: P15.1 Re1.1 Re2.1 Re3.1 Re4.1 Re5.1 Re6.1 Re7.1 Re8.1 Re9.1 | length 9591.3
  Top Layer w10: P15.1 5725,6875 5625,6775 5625,3825 5675,3775 6025,3775 6150,3900 Re7.1 Re8.1 Re9.1 6925,4055 7055,3925 7475,3925 7650,4100 7650,5425 Re6.1 Re5.1 Re4.1 Re3.1 Re2.1 Re1.1
Voltmeter-: P15.2 Re11.1 Re12.1 Re13.1 Re14.1 | length 6877.8
  Top Layer w10: v1(5750,3825) 5675,3900 5675,5325 5875,5525 ; P15.2 6325,6800 6300,6775 5725,6775 5650,6700 5650,5625 5750,5525 5875,5525 ; Re14.1 6912.5,5512.5 6562.5,5512.5 6550,5525 6150,5525 5875,5525
  Bottom Layer w10: v1(5750,3825) 7275,3825 7325,3875 Re11.1
pads on no net: CON1.4 CON1.5 CON1.6 CON1.8 CON1.13 CON2.2 CON2.3 CON2.4 CON2.MH1 CON2.MH2 CON2.Shell M1. M1.1 M1.4 M1.7 M1.13 M1.17 M1.18 M1.19 M1.20

## Polygon pours and split planes (outlines as drawn)
GND on Top Layer "GND_L01_P052" (hatched Horizontal grid 20 track 8, pour order 52): 5500,3125 9950,3125 9925,3150 9925,7050 5500,7050
no net on Top Layer (solid, pour order 48): 9900,7050
no net on Top Layer "Top Layer-No Net" (solid, pour order 16): 4190,2115
no net on Mechanical 1 (solid): 1735,6955
GND on Bottom Layer "GND_L02_P050" (hatched Horizontal grid 20 track 8, pour order 50): 9934.75,3325 9925,3125 5500,3125 5500,7050 9925,7050 9925,4500 9925,3325
no net on Bottom Layer (solid, pour order 44): 5900,3525
no net on Bottom Layer (solid, pour order 42): 5375,3275

## Other copper
Top Layer:
  text "Test Jig Board" at 6400,3500 h60

## Silkscreen, mask and mechanical layers (free items; w line width, h text height)
Mechanical 1:
  lines w10: 5500,3125 5500,7050 9875,7050 9925,7000 9925,3125 5500,3125

## Text inside footprints (layer, text, board x,y; h text height)
CON2: Mechanical 2 "PCB Edge" at 7450,6857.68 h16 r180